# Altium PCB mb.PcbDoc
Units mil, origin at the board's own origin, x right, y up, seen from the top; angles counter-clockwise.
Board outline 6000 x 4000 mil, 2 copper layers (Top Layer, Bottom Layer); 8 components, 31 nets, 220 pads, 0 vias.
Unrouted connection lines stored in the file: 1.
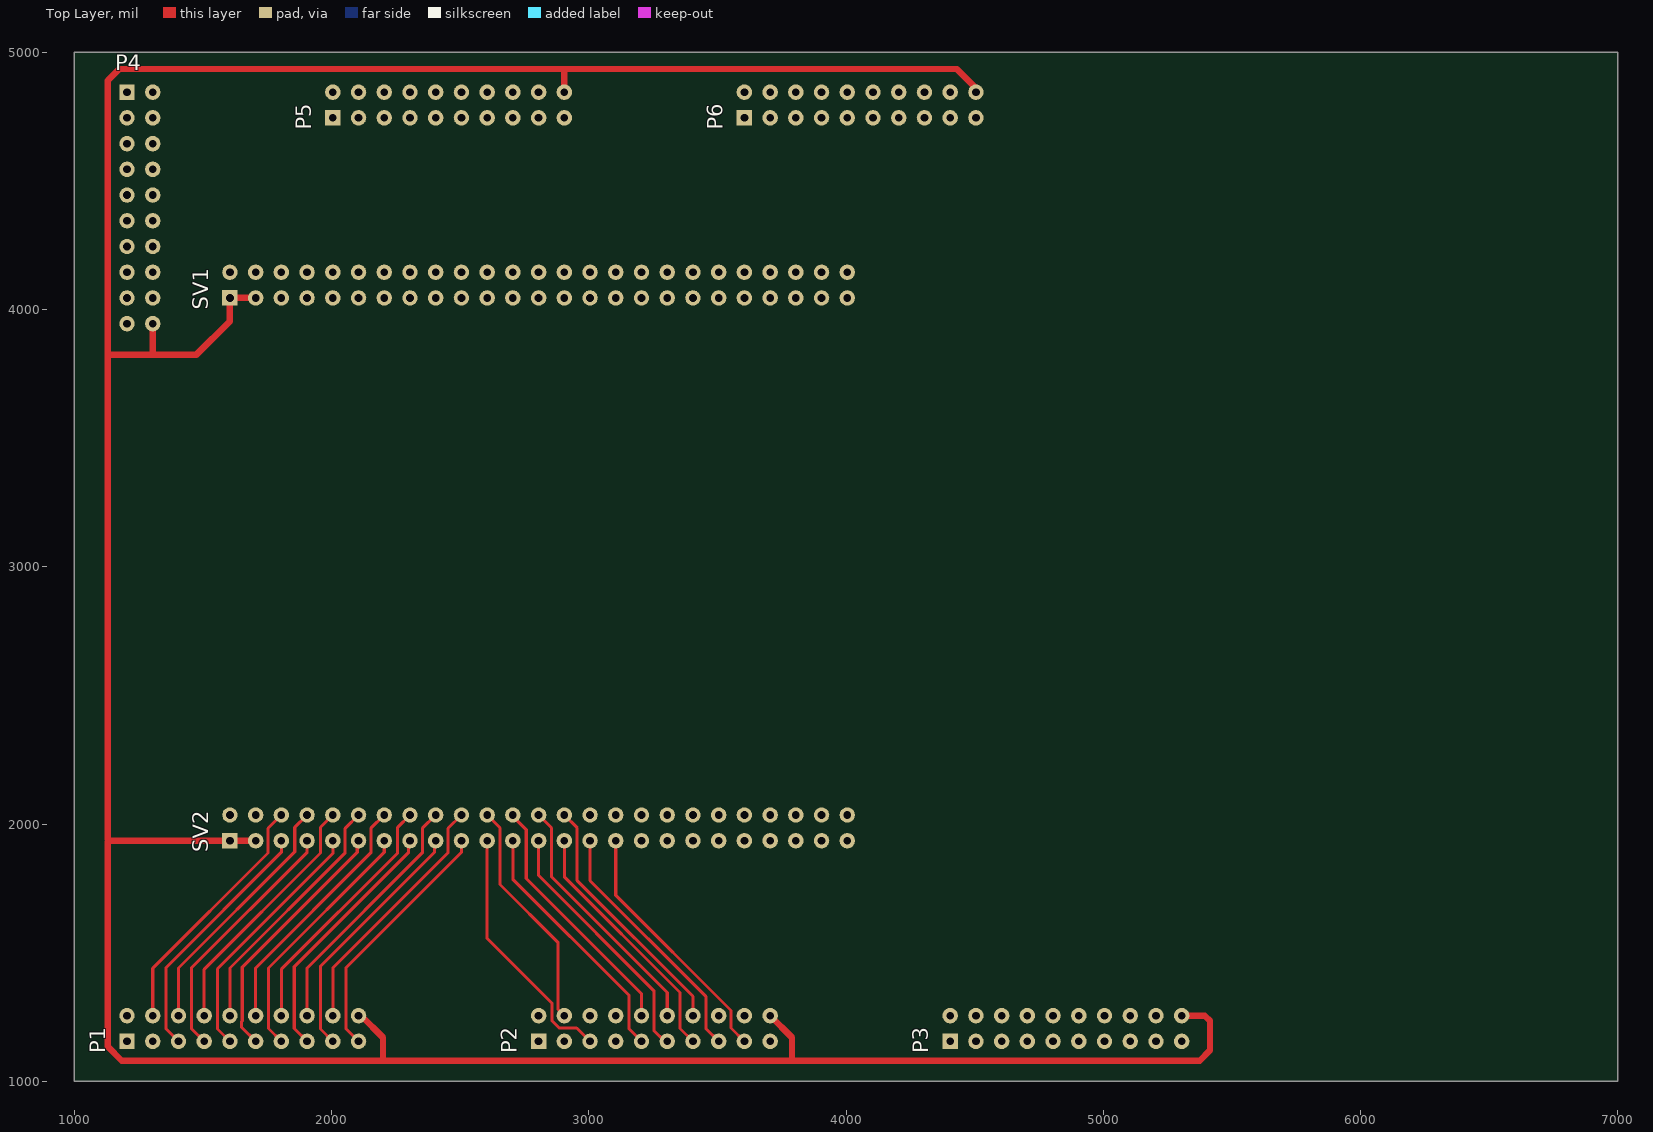
[diagram p0: Top Layer view]
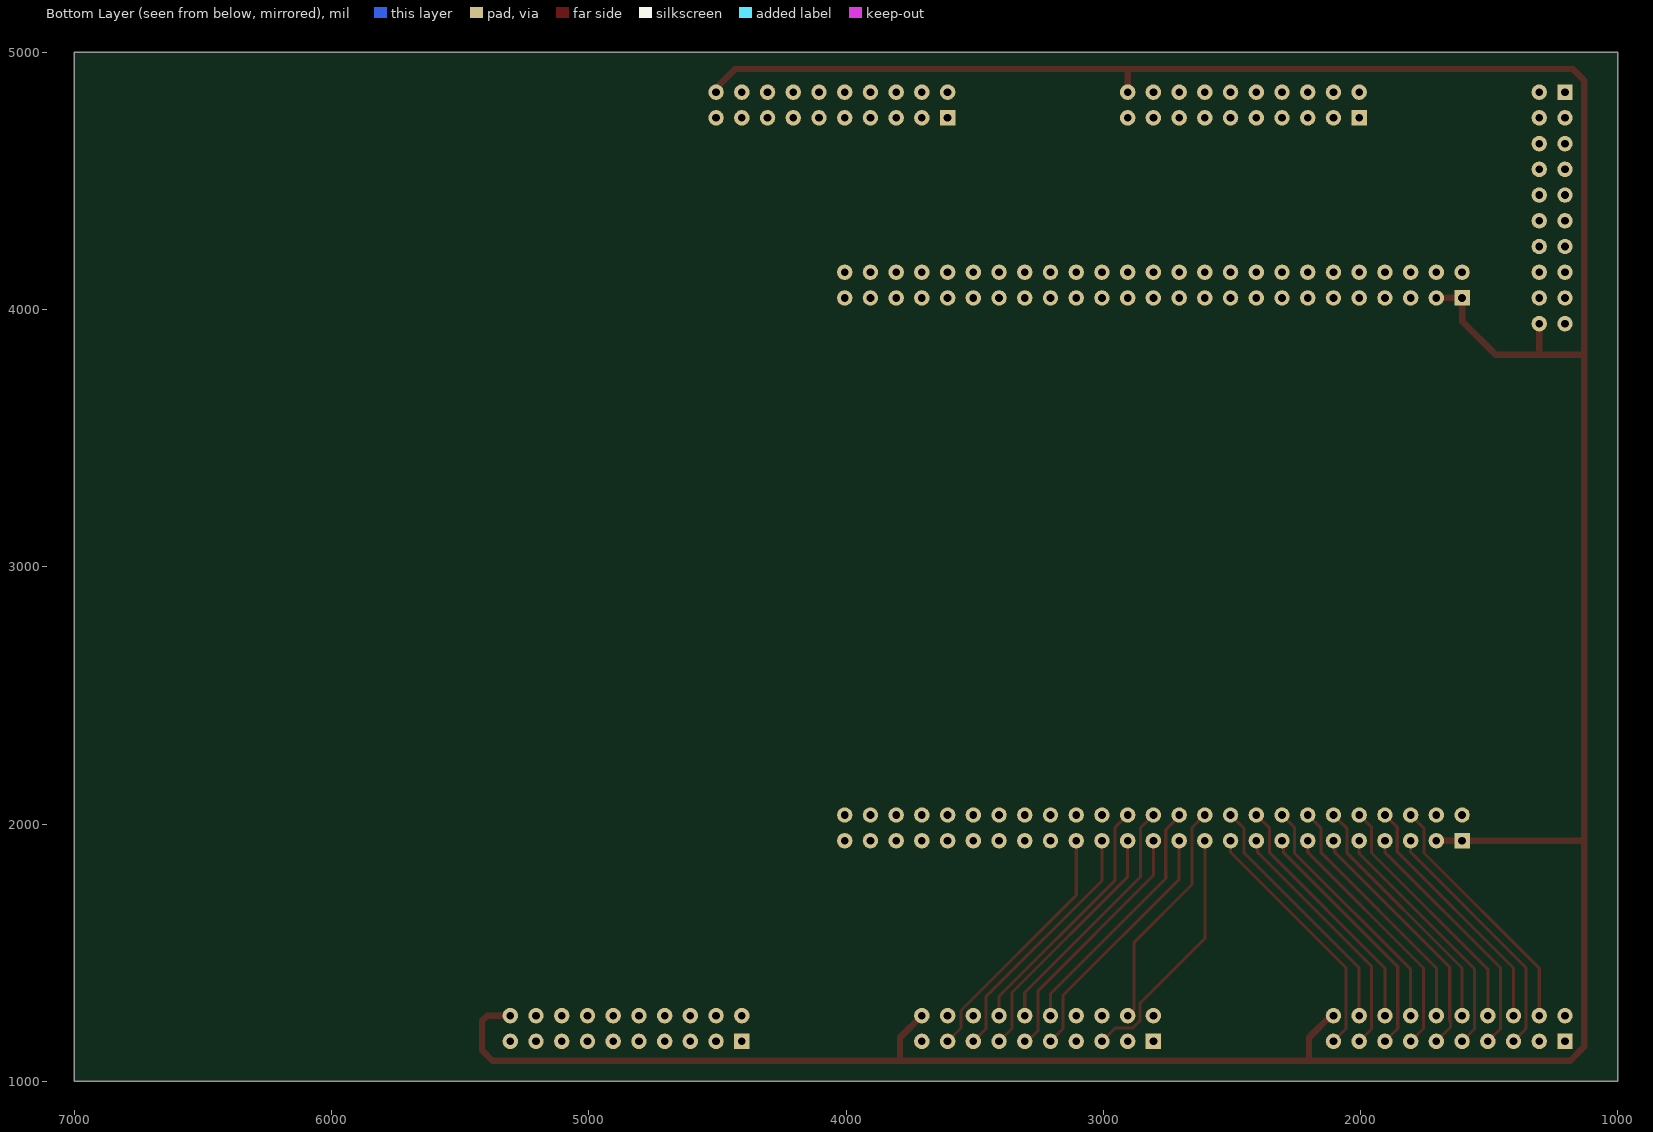
[diagram p1: Bottom Layer view, seen from below]

## Layer stack, top to bottom
Top Solder: solder mask 0.4, Solder Resist, Dk 3.5
Top Layer: signal copper 1.4
Dielectric 1: dielectric 12.6, FR-4, Dk 4.8
Bottom Layer: signal copper 1.4
Bottom Solder: solder mask 0.4, Solder Resist, Dk 3.5

## Board outline
1000,1000 7000,1000 7000,5000 1000,5000

## Design rules (kind name [scope] priority, off if disabled: settings)
Clearance [All] p1: gap=12
PolygonConnect [All] p1: connectstyle=Relief reliefconductorwidth=10 reliefentries=4 polygonreliefangle="90 Angle" airgapwidth=10
RoomDefinition mb [InComponentClass('mb')] p1: confinementstyle=ConfineIn formatcopy=TRUE lockcomponents=FALSE outline 1000,1000 1000,5000 5500,5000 5500,1000
RoutingLayers [All] p1: top layer_v5=TRUE bottom layer_v5=FALSE
RoutingVias [All] p1: holewidth=28 width=50 viastyle="Through Hole" minholewidth=28 minwidth=50 maxholewidth=28 maxwidth=50
SolderMaskExpansion [All] p1: expansion=4
Width [All] p1: maxlimit=25 minlimit=12 preferedwidth=12 minimp=50.000000 maximp=50.000000 favimp=50.000000
29 further rules are at their usual default settings.

## Classes and differential pairs
component class mb: P1 P2 P3 P4 P5 P6 SV1

## Components (designator, comment, footprint, x,y, rotation, side; value= is the part's Value field where it differs from the comment)
P1 "Pod1" "Pin Header 20x2" 2105,1155 r90 top locked
P2 "Pod2" "Pin Header 20x2" 3705,1155 r90 top locked
P3 "Pod3" "Pin Header 20x2" 5305,1155 r90 top locked
P4 "Pod4" "Pin Header 20x2" 1205,3945 r0 top locked
P5 "Pod5" "Pin Header 20x2" 2905,4745 r90 top locked
P6 "Pod6" "Pin Header 20x2" 4505,4745 r90 top locked
SV1 "Mojo SV1" PH25X2 4005,4045 r90 top
SV2 "Mojo SV2" PH25X2 4005,1935 r90 top

## Footprints (in the part's own frame and the unit in brackets; to place one, negate y for a bottom-side part, rotate by r counter-clockwise, add the part's x,y. Pads: shape width x height; smd on the part's side, far side on the other; paste and mask are expansions set on the pad)
PH25X2 [mil]
  rect 60x60 hole 30: 1(0,2400)
  round 60 hole 30: 2(100,2400) 3(0,2300) 4(100,2300) 5(0,2200) 6(100,2200) 7(0,2100) 8(100,2100) 9(0,2000) 10(100,2000) 11(0,1900) 12(100,1900) 13(0,1800) 14(100,1800) 15(0,1700) 16(100,1700) 17(0,1600) 18(100,1600) 19(0,1500) 20(100,1500) 21(0,1400) 22(100,1400) 23(0,1300) 24(100,1300) 25(0,1200) 26(100,1200) 27(0,1100) 28(100,1100) 29(0,1000) 30(100,1000) 31(0,900) 32(100,900) 33(0,800) 34(100,800) 35(0,700) 36(100,700) 37(0,600) 38(100,600) 39(0,500) 40(100,500) 41(0,400) 42(100,400) 43(0,300) 44(100,300) 45(0,200) 46(100,200) 47(0,100) 48(100,100) 49(0,0) 50(100,0)
"Pin Header 20x2" [mil]
  rect 60x60 hole 30: 1(0,900)
  round 60 hole 30: 2(100,900) 3(0,800) 4(100,800) 5(0,700) 6(100,700) 7(0,600) 8(100,600) 9(0,500) 10(100,500) 11(0,400) 12(100,400) 13(0,300) 14(100,300) 15(0,200) 16(100,200) 17(0,100) 18(100,100) 19(0,0) 20(100,0)

## Part data
P1: library part P*
SV1: library part SV1
SV2: library part SV2

## Nets (pads, with @x,y where several pads share a name; then routed paths per layer and width w, separated by ;. In a path a pad name is that pad's centre, name@x,y a point inside that pad or via, vN(x,y) a via of type N, cw(c..) or ccw(c..) an arc to the next point about the centre after c; other vN are vias at no path point)
FD0: P1.19 SV2.19 | length 985.4
  Top Layer w12: P1.19 2057,1203 2057,1442 2505,1890 SV2.19
FD1: P1.18 SV2.20 | length 987.1
  Top Layer w12: P1.18 2005,1440 2453,1888 2453,1983 SV2.20
FD2: P1.17 SV2.17 | length 985.4
  Top Layer w12: P1.17 1957,1203 1957,1447 2400,1890 2400,1930 SV2.17
FD3: P1.16 SV2.18 | length 987.1
  Top Layer w12: P1.16 1905,1440 2353,1888 2353,1983 SV2.18
FD4: P1.15 SV2.15 | length 987.1
  Top Layer w12: P1.15 1855,1205 1855,1445 2300,1890 2300,1930 SV2.15
FD5: P1.14 SV2.16 | length 987.1
  Top Layer w12: P1.14 1805,1435 2257,1887 2257,1987 SV2.16
FD6: P1.13 SV2.13 | length 987.1
  Top Layer w12: P1.13 1755,1205 1755,1440 2205,1890 SV2.13
FD7: P1.12 SV2.14 | length 987.1
  Top Layer w12: P1.12 1705,1440 2153,1888 2153,1983 SV2.14
FD8: P1.11 SV2.11 | length 991.2
  Top Layer w12: P1.11 1650,1210 1650,1232.12 1653,1235.12 1653,1443 2100,1890 2100,1930 SV2.11
FD9: P1.10 SV2.12 | length 987.1
  Top Layer w12: P1.10 1605,1440 2053,1888 2053,1983 SV2.12
FD10: P1.9 SV2.9 | length 985.4
  Top Layer w12: P1.9 1557,1203 1557,1437 2005,1885 SV2.9
FD11: P1.8 SV2.10 | length 987.1
  Top Layer w12: P1.8 1505,1435 1957,1887 1957,1987 SV2.10
FD12: P1.7 SV2.7 | length 987.1
  Top Layer w12: P1.7 1455,1205 1455,1440 1905,1890 SV2.7
FD13: P1.6 SV2.8 | length 987.1
  Top Layer w12: P1.6 1405,1440 1857,1892 1857,1987 SV2.8
FD14: P1.5 SV2.5 | length 985.4
  Top Layer w12: P1.5 1357,1203 1357,1442 1805,1890 SV2.5
FD15: P1.4 SV2.6 | length 987.1
  Top Layer w12: P1.4 1305,1439 1753,1887 1753,1983 SV2.6
FIFO0: P2.15 SV2.29 | length 987.1
  Top Layer w12: SV2.29 3005,1780 3455,1330 3455,1205 P2.15
FIFO1: P2.14 SV2.28 | length 987.1
  Top Layer w12: SV2.28 2955,1985 2955,1780 3405,1330 P2.14
FLAGA: P2.11 SV2.25 | length 993
  Top Layer w12: SV2.25 2805,1800 3253,1352 3253,1197 3295,1155 P2.11
FLAGB: P2.10 SV2.24 | length 987.1
  Top Layer w12: SV2.24 2705,2030 2757,1978 2757,1788 3205,1340 P2.10
FLAGC: P2.9 SV2.23 | length 987.1
  Top Layer w12: SV2.23 2705,1785 3157,1333 3157,1203 P2.9
FLAGD: P2.12 SV2.26 | length 987.1
  Top Layer w12: SV2.26 2855,1985 2855,1795 3305,1345 P2.12
GND: P1.20 P2.20 P3.20 P4.20 P5.20 P6.20 SV1.1 SV1.3 SV2.1 SV2.3 | length 13687.8
  Top Layer w12: P1.20 P1.20@2115,1255 ; 3785,1080 3790,1085 ; P6.20 P6.20@4505,4860
  Top Layer w25: 1130,1940 1130,3825 ; P4.20 1305,3825 ; SV2.3@1705,1930 SV2.3@1700,1935 ; SV2.3 SV2.3@1700,1935 ; SV1.3 SV1.1 1605,3955 1475,3825 1305,3825 ; P1.20@2115,1255 2200,1170 2200,1080 ; P5.20 2905,4935 ; P2.20 3790,1170 3790,1085 ; P6.20@4505,4860 4430,4935 2905,4935 ; P3.20 5395,1255 5415,1235 5415,1120 5375,1080 3785,1080 2200,1080 ; 1130,3825 1305,3825 ; 1130,3825 1130,4890 1175,4935 2905,4935 ; SV2.3@1700,1935 SV2.1 1135,1935 1130,1930 1130,1135 1185,1080 2200,1080
IFCLK: P5.3 SV2.30
INT0#: P2.19
INT1#: P2.18
PKTEND: P2.13 SV2.27 | length 987.1
  Top Layer w12: SV2.27 2905,1795 3355,1345 3355,1205 P2.13
SLOE: P2.17 SV2.31 | length 987.1
  Top Layer w12: SV2.31 3105,1722.88 3553,1274.88 3553,1207 P2.17
SLRD: P2.5 SV2.21 | length 985.4
  Top Layer w12: SV2.21 2605,1555 2857,1303 2857,1235.12 2885.12,1207 2953,1207 P2.5
SLWR: P2.4 SV2.22 | length 904.3
  Top Layer w12: SV2.22 2655,1985 2655,1764.94 2881,1538.94 2881,1279 P2.4
WU2: P2.16
pads on no net: P1.1 P1.2 P1.3 P2.1 P2.2 P2.3 P2.6 P2.7 P2.8 P3.1 P3.2 P3.3 P3.4 P3.5 P3.6 P3.7 P3.8 P3.9 P3.10 P3.11 P3.12 P3.13 P3.14 P3.15 P3.16 P3.17 P3.18 P3.19 P4.1 P4.2 P4.3 P4.4 P4.5 P4.6 P4.7 P4.8 P4.9 P4.10 P4.11 P4.12 P4.13 P4.14 P4.15 P4.16 P4.17 P4.18 P4.19 P5.1 P5.2 P5.4 P5.5 P5.6 P5.7 P5.8 P5.9 P5.10 P5.11 P5.12 P5.13 P5.14 P5.15 P5.16 P5.17 P5.18 P5.19 P6.1 P6.2 P6.3 P6.4 P6.5 P6.6 P6.7 P6.8 P6.9 P6.10 P6.11 P6.12 P6.13 P6.14 P6.15 P6.16 P6.17 P6.18 P6.19 SV1.2 SV1.4 SV1.5 SV1.6 SV1.7 SV1.8 SV1.9 SV1.10 SV1.11 SV1.12 SV1.13 SV1.14 SV1.15 SV1.16 SV1.17 SV1.18 SV1.19 SV1.20 SV1.21 SV1.22 SV1.23 SV1.24 SV1.25 SV1.26 SV1.27 SV1.28 SV1.29 SV1.30 SV1.31 SV1.32 SV1.33 SV1.34 SV1.35 SV1.36 SV1.37 SV1.38 SV1.39 SV1.40 SV1.41 SV1.42 SV1.43 SV1.44 SV1.45 SV1.46 SV1.47 SV1.48 SV1.49 SV1.50 SV2.2 SV2.4 SV2.32 SV2.33 SV2.34 SV2.35 SV2.36 SV2.37 SV2.38 SV2.39 SV2.40 SV2.41 SV2.42 SV2.43 SV2.44 SV2.45 SV2.46 SV2.47 SV2.48 SV2.49 SV2.50